# Altium PCB LDO_PCB.PcbDoc
Units mm, origin at the board's own origin, x right, y up, seen from the top; angles counter-clockwise.
Board outline 19.08 x 10.11 mm, 4 copper layers (Top Layer, Inner Layer L1, Inner Layer L3, Bottom Layer), stack 1.564 mm thick; 9 components, 8 nets, 25 pads, 7 vias.
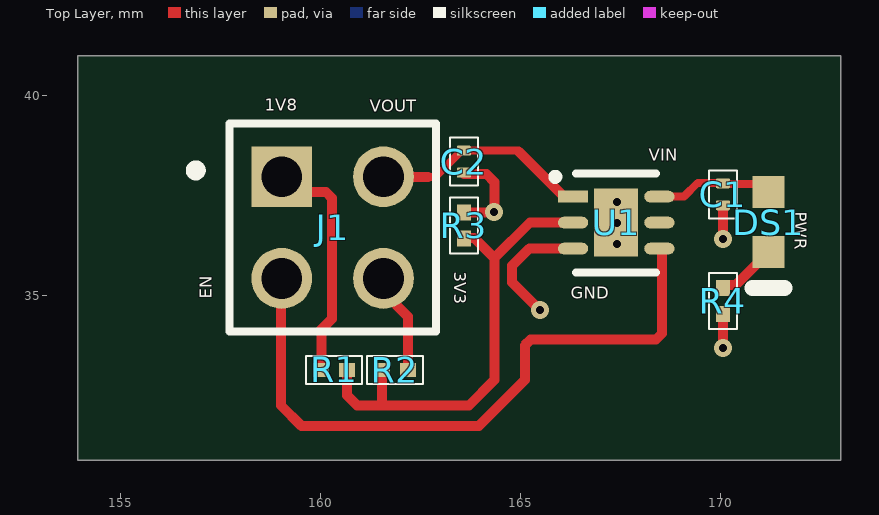
[diagram p0: Top Layer view]
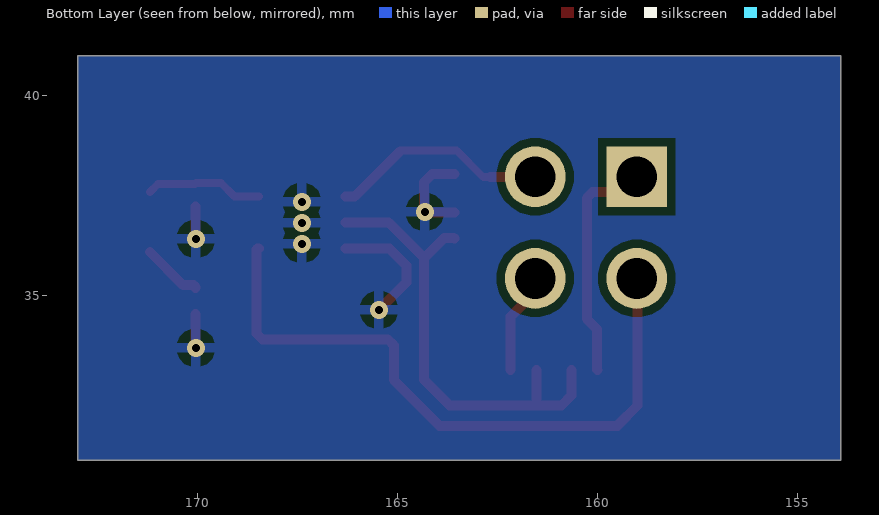
[diagram p1: Bottom Layer view, seen from below]
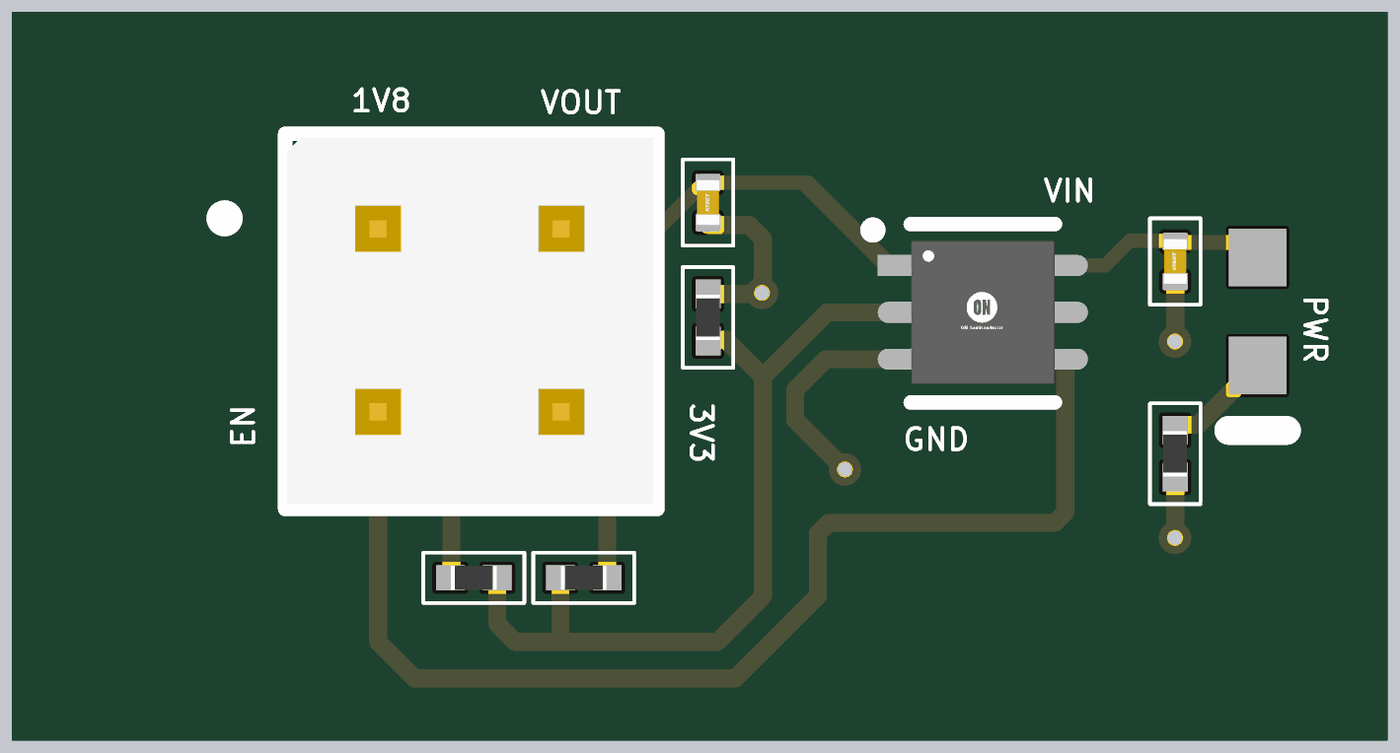
[diagram p2: 3D render of the assembled board from above, using the file's embedded part models]

## Layer stack, top to bottom
Top Solder: solder mask 0.0152, Solder Resist, Dk 3.8
Top Layer: signal copper 0.035
Prepeg 1: prepreg 0.0994, PP-015, Dk 4.1
Inner Layer L1: signal copper 0.0152
Core: core 1.265, FR-4, Dk 4.6
Inner Layer L3: signal copper 0.0152
Prepeg 2: prepreg 0.0994, PP-015, Dk 4.1
Bottom Layer: signal copper 0.035
Bottom Solder: solder mask 0.0152, Solder Resist, Dk 3.8

## Board outline
153.924,30.887 173,30.887 173,41 153.924,41

## Design rules (kind name [scope] priority, off if disabled: settings)
Clearance "Stitching No Net" [IsStitchingVia and InNet('No Net') vs (IsVia and (Not IsStitchingVia)) Or IsPad] p1: gap=0.127 ignorepadtopadclearanceinfootprint=FALSE
Clearance [All] p2: gap=0.2 ignorepadtopadclearanceinfootprint=TRUE except(0.102: Arc-Text Track-Text SMDPad-Text THPad-Text Fill-Text Poly-Text Region-Text Text-Text; 0.114: Arc-Arc Arc-Track Arc-SMDPad Arc-Via Track-Track Track-SMDPad Track-Via; 0.127: Via-Text; 0.152: Arc-THPad Track-THPad SMDPad-SMDPad SMDPad-THPad SMDPad-Via THPad-THPad THPad-Via Via-Via; 0.25: Arc-Hole Track-Hole SMDPad-Hole THPad-Hole Via-Hole Fill-Hole Poly-Hole Region-Hole Text-Hole)
ComponentClearance [All] p1: gap=0 collisioncheckmode=3 verticalgap=0 showdistances=FALSE
DiffPairsRouting DIFF90 [InDifferentialPairClass('All Differential Pairs')] p1: maxlimit=0.254 minlimit=0.15 mostfreqgap=0.254 toplayer_maxgap=0.15 toplayer_prefgap=0.15 toplayer_minwidth=0.141 toplayer_maxwidth=0.141 toplayer_prefwidth=0.141 midlayer1_minwidth=0.381 midlayer1_maxwidth=0.381 midlayer1_prefwidth=0.381 midlayer2_mingap=0.25 midlayer2_maxgap=0.25 midlayer2_prefgap=0.25 midlayer2_minwidth=0.139 midlayer2_maxwidth=0.139 midlayer2_prefwidth=0.139 bottomlayer_maxgap=0.15 bottomlayer_prefgap=0.15 bottomlayer_minwidth=0.137 bottomlayer_maxwidth=0.137 bottomlayer_prefwidth=0.137 impedanceprofiledriven=TRUE maxuncoupledlength=12.7
HoleSize [All] p1: absolutevalues=TRUE maxlimit=6.3 minlimit=0.2 maxpercent=80.000 minpercent=20.000
MinimumSolderMaskSliver [All] p1: minsoldermaskwidth=0.08
PlaneConnect [All] p1: pad.planeconnectstyle=Relief pad.reliefexpansion=0.508 pad.reliefentries=4 pad.reliefconductorwidth=0.508 pad.reliefairgap=0.254 via.planeconnectstyle=Direct via.reliefexpansion=0.508 via.reliefentries=4 via.reliefconductorwidth=0.508 via.reliefairgap=0.254
PolygonConnect [All] p1: connectstyle=Direct reliefconductorwidth=0.254 reliefentries=4 polygonreliefangle="90 Angle" airgapwidth=0.254
RoutingVias "General Vias" [All] p1: holewidth=0.2 width=0.45 viastyle="Through Hole" minholewidth=0.2 minwidth=0.45 maxholewidth=0.5 maxwidth=6.3
SilkToSilkClearance [All] p1: silktosilkclearance=0.15
SilkToSolderMaskClearance [IsPad] p1: minsilkscreentomaskgap=0.14 clearancetoexposedcopper=TRUE
SolderMaskExpansion [All] p1: expansion=0.038 istentingtop=FALSE
SupplyNets "Schematic Supply Nets_9" [InNet('4V5')] p1: voltage=0.000
SupplyNets "Schematic Supply Nets_6" [InNet('VOUT')] p2: voltage=0.000
SupplyNets "Schematic Supply Nets" [InNet('GND')] p3: voltage=0.000
UnRoutedNet [All] p1: checkbadconnections=TRUE
Width [All] p1: maxlimit=5 minlimit=0.1 preferedwidth=0.25
22 further rules are at their usual default settings.

## Components (designator, comment, footprint, x,y, rotation, side; value= is the part's Value field where it differs from the comment)
C1 "4.7 μF" CAP_0201 170.053,37.536 r90 top
C2 "4.7 μF" CAP_0201 163.576,38.354 r90 top
DS1 "HSMH-C190" HSMH-C190 171.196,36.842 r270 top
J1 "HTSW-102-07-G-D" FP-HTSW-102-07-G-D-MFG 160.295,36.705 r270 top
R1 "110 kΩ" RES_0201 160.33,33.147 r180 top
R2 "390 kΩ" RES_0201 161.854,33.147 r0 top
R3 "220 kΩ" RES_0201 163.576,36.759 r90 top
R4 "960 Ω" RES_0201 170.053,34.869 r270 top
U1 "NCP718AMTADJTBG" NCP718AMTADJTBG 167.386,36.83 r0 top

## Footprints (in the part's own frame and the unit in brackets; to place one, negate y for a bottom-side part, rotate by r counter-clockwise, add the part's x,y. Pads: shape width x height; smd on the part's side, far side on the other; paste and mask are expansions set on the pad)
CAP_0201 [mm]
  rrect25% 0.25x0.35 smd mask+0.05: 1(-0.275,0) 2(0.275,0)
  silkscreen extent -0.6,-0.35 0.6,0.35, body extent -0.32,-0.17 0.32,0.16, height 0.34
FP-HTSW-102-07-G-D-MFG [mm]
  rect 1.52x1.52 hole 1.02 paste-2539.97 mask+0: 1(-1.27,-1.27)
  round 1.52 hole 1.02 paste-2539.97 mask+0: 2(-1.27,1.27) 3(1.27,-1.27) 4(1.27,1.27)
  silkscreen extent -2.6,-3.54 2.6,2.58, body extent -2.7,-2.68 2.7,2.68, height 0.25
HSMH-C190 [mm] "SMD, 2-Leads, Body 1.6x0.8mm, Height 0.9mm"
  rect 0.8x0.8 smd: 1(-0.75,0) 2(0.75,0)
  silkscreen extent 1.65,-0.4 1.65,0.4, body extent -0.8,-0.4 0.8,0.4, height 0.9
NCP718AMTADJTBG [mm]
  rect 0.756x0.292 smd paste+0 mask+0: 1(-1.078,0.65)
  rrect100% 0.756x0.292 smd paste+0 mask+0: 2(-1.078,0) 3(-1.078,-0.65) 4(1.078,-0.65) 5(1.078,0) 6(1.078,0.65)
  rect 1.1x1.7 smd paste-1000 mask+0: 7(0,0)
  silkscreen extent -1.57,-1.25 1,1.22, body extent -1.96,-1.5 1.96,1.5, height 0.25
RES_0201 [mm]
  rect 0.4x0.35 smd mask+0.05: 1(-0.325,0) 2(0.325,0)
  silkscreen extent -0.7,-0.35 0.7,0.35, body extent -0.32,-0.17 0.32,0.17, height 0.26

## Part data
C1: library part CAP_0201, "Capacitor SMD 0201 Generic", Capacitance="10 nF", LCSC Part Number=C272853, Manufacturer=YAGEO, Manufacturer Part Number=CC0201KRX7R7BB103, Tolerance=10%
C2: library part CAP_0201, "Capacitor SMD 0201 Generic", LCSC Part Number=C272853, Manufacturer=YAGEO, Manufacturer Part Number=CC0201KRX7R7BB103, Tolerance=10%, Capacitance="4.7 μF"
DS1: "LED Uni-Color Red, 65 mW, 20 mA, -40 to 85 degC, 2-Pin SMD, RoHS, Tape and Reel", Current Rating="1 A", Max Operating Temperature="85 degC", Min Operating Temperature="-30 degC", Package Quantity=2000, ComponentLink1Description="Manufacturer URL", ComponentLink1URL=http://www.avagotech.com/, ComponentLink2Description=Datasheet, ComponentLink2URL=http://docs.avagotech.com/docs/AV02-0551EN, ComponentLink3Description="Package Specification", ComponentLink3URL=http://www.fairchildsemi.com/dwg/MA/MA03D.pdf, Connector Type=USB, Contact Material=Copper, Contact Plating=Gold, DatasheetVersion=Mar-12, Gender=Male, Height="2.8 mm", Lead Pitch="0.65 mm", Length="7.5 mm", Mount="Surface Mount", PackageDescription="2-Pin Surface Mount Device, Body 1.6 x 0.8 mm, Height 0.9 mm", PackageReference=HSMX-C190, Packaging="Tape and Reel", Pins=5, REACH SVHC="No SVHC", RoHSCompliant=true, Width="5.6 mm"
J1: library part CMP-02766-000010-1, "CONN HEADER VERT 4POS 2.54MM", Current Rating=6.3A, Manufacturer=Samtec, Temperature="-55°C to +125°C", Temperature Range High=+125°C, Temperature Range Low=-55°C, Voltage Rating=550V, Automotive=No, Category=Conn, ComponentLink2Description=Datasheet, ComponentLink2URL=http://suddendocs.samtec.com/catalog_english/htsw_th.pdf, Conn Gender=Male, Conn Orientation=Straight, Contact Material=Gold,Nickel, Device Class L1=Connectors, Device Class L2="Headers and Wire Housings", Device Class L3=unset, Digikey Description="CONN HEADER VERT 4POS 2.54MM", Height=8.71mm, Lead Free=Yes, Manufacturer Part Number=HTSW-102-07-G-D, Mouser Description="Conn Unshrouded Header HDR 4 POS 2.54mm Solder ST Thru-Hole Bag", Number Of Contacts=4, Number Of Rows=2, Octopart=https://octopart.com/htsw-102-07-g-d-samtec-10531767, Package=HTSW-102-07-G-D, Pitch=2.54mm, RoHS=TRUE
R1: library part RES_0201, "Resistor SMD 0201", LCSC Part Number=C852221, Manufacturer=YAGEO, Manufacturer Part Number=RT0201BRD07200RL, Resistance="110 kOhm", Tolerance=0.1%
R2: library part RES_0201, "Resistor SMD 0201 Generic", LCSC Part Number=C852221, Manufacturer=YAGEO, Manufacturer Part Number=RT0201BRD07200RL, Resistance="390 kOhm", Tolerance=0.1%
R3: library part RES_0201, "Resistor SMD 0201 Generic", LCSC Part Number=C852221, Manufacturer=YAGEO, Manufacturer Part Number=RT0201BRD07200RL, Resistance="220 kOhm", Tolerance=0.1%
R4: library part RES_0201, "Resistor SMD 0201 Generic", LCSC Part Number=C852221, Manufacturer=YAGEO, Manufacturer Part Number=RT0201BRD07200RL, Resistance="200 Ohm", Tolerance=0.1%
U1: "NCP718AMTADJTBG LDO Regulator, 300 mA, Wide Vin, Ultra-Low Iq Adjustable, Active Discharge, WDFN6", Dropout Voltage=490mV, Manufacturer Lifecycle Status=ACTIVE, Max Junction Temperature (Tj)=150°C, Max Supply Voltage=24V, Min Supply Voltage=2.5V, Nominal Supply Current=4µA, Output Current=300mA, Accuracy=2%, Height=800µm, Lifecycle Status=Production, Max Operating Temperature=150°C, NexarPartId=87159789, Number of Channels=1, Number of Outputs=1, Output Type=Adjustable, RoHS=Compliant, Schedule B="8542390000, 8542390000|8542390000|8542390000|8542390000|8542390000"

## Via types
v1: diameter 0.45, hole 0.2, Top Layer to Bottom Layer, tented both sides, 7 vias

## Nets (pads, with @x,y where several pads share a name; then routed paths per layer and width w, separated by ;. In a path a pad name is that pad's centre, name@x,y a point inside that pad or via, vN(x,y) a via of type N, cw(c..) or ccw(c..) an arc to the next point about the centre after c; other vN are vias at no path point)
4V5: C1.2 DS1.1 U1.6 | length 3
  Top Layer w0.2: U1.6 169.08,37.48 169.425,37.825 170.039,37.825 C1.2 170.064,37.8 170.988,37.8 DS1.1
EN_PIN: J1.3 U1.4 | length 16.6
  Top Layer w0.25: J1.3 159.004,35.414 159.004,32.258 159.512,31.75 163.957,31.75 165.1,32.893 165.1,33.763 165.246,33.909 168.383,33.909 168.529,34.055 168.529,36.16 168.509,36.18 U1.4
GND: C1.1 C2.1 R3.2 R4.2 U1.3 U1.7 | length 7
  Top Layer w0.25: R3.2 164.338,37.084 164.338,37.846 164.14,38.044 C2.1@163.576,38.044 ; v1@165.481,34.671 165.449,34.671 164.786,35.334 164.786,35.754 165.212,36.18 U1.3 ; v1@170.053,33.782 R4.2 ; v1@170.053,36.449 C1.1@170.053,37.226
  other v1: 170.05,33.7 165.475,34.65 167.4,36.3 170.05,36.425 167.4,36.825 164.325,37.1 167.4,37.35
NetDS1_2: DS1.2 R4.1 | length 1.5
  Top Layer w0.25: R4.1 170.053,35.219 170.103,35.269 170.373,35.269 DS1.2
VADJ: R1.1 R2.1 R3.1 U1.2 | length 11.9
  Top Layer w0.25: R1.1 160.655,32.512 160.909,32.258 161.544,32.258 ; R2.1 161.529,32.273 161.544,32.258 ; R3.1 163.591,36.449 163.83,36.449 164.338,35.941 ; U1.2 165.227,36.83 164.338,35.941 ; 161.544,32.258 163.703,32.258 164.338,32.893 164.338,35.941
VADJ_1V8: J1.1 R1.2 | length 5.9
  Top Layer w0.25: J1.1 159.408,37.592 160.128,37.592 160.274,37.446 160.274,34.417 160.02,34.163 160.02,33.162 R1.2
VADJ_3V3: J1.4 R2.2 | length 2.5
  Top Layer w0.25: J1.4 161.565,35.091 162.179,34.477 R2.2
VOUT: C2.2 J1.2 U1.1 | length 5.5
  Top Layer w0.2: 162.679,37.965 162.862,37.965 163.526,38.629 C2.2 164.927,38.629 164.948,38.608
  Top Layer w0.25: J1.2 161.575,37.965 162.679,37.965 ; 164.948,38.608 166.076,37.48 U1.1
pads on no net: U1.5

## Polygon pours and split planes (outlines as drawn)
GND on Bottom Layer "GND_L04_P000" (solid, pour order 0): 153.924,30.887 173,30.887 173,41 153.924,41

## Silkscreen, mask and mechanical layers (free items; w line width, h text height)
Top Overlay:
  text "1V8" at 158.6,39.625 h0.3
  text "VOUT" at 161.225,39.6 h0.3
  text "VIN" at 168.2,38.375 h0.3
  text "PWR" at 171.85,37.1 h0.3 r270
  text "3V3" at 163.342,35.603 h0.3 r270
  text "EN" at 157.275,34.925 h0.3 r90
  text "GND" at 166.25,34.925 h0.3